# Altium PCB PCB1.PcbDoc
Units mil, origin at the board's own origin, x right, y up, seen from the top; angles counter-clockwise.
Board outline 1481.13 x 2004.6 mil, 2 copper layers (Top Layer, Bottom Layer); 52 components, 37 nets, 204 pads, 62 vias.
Unrouted connection lines stored in the file: 75.
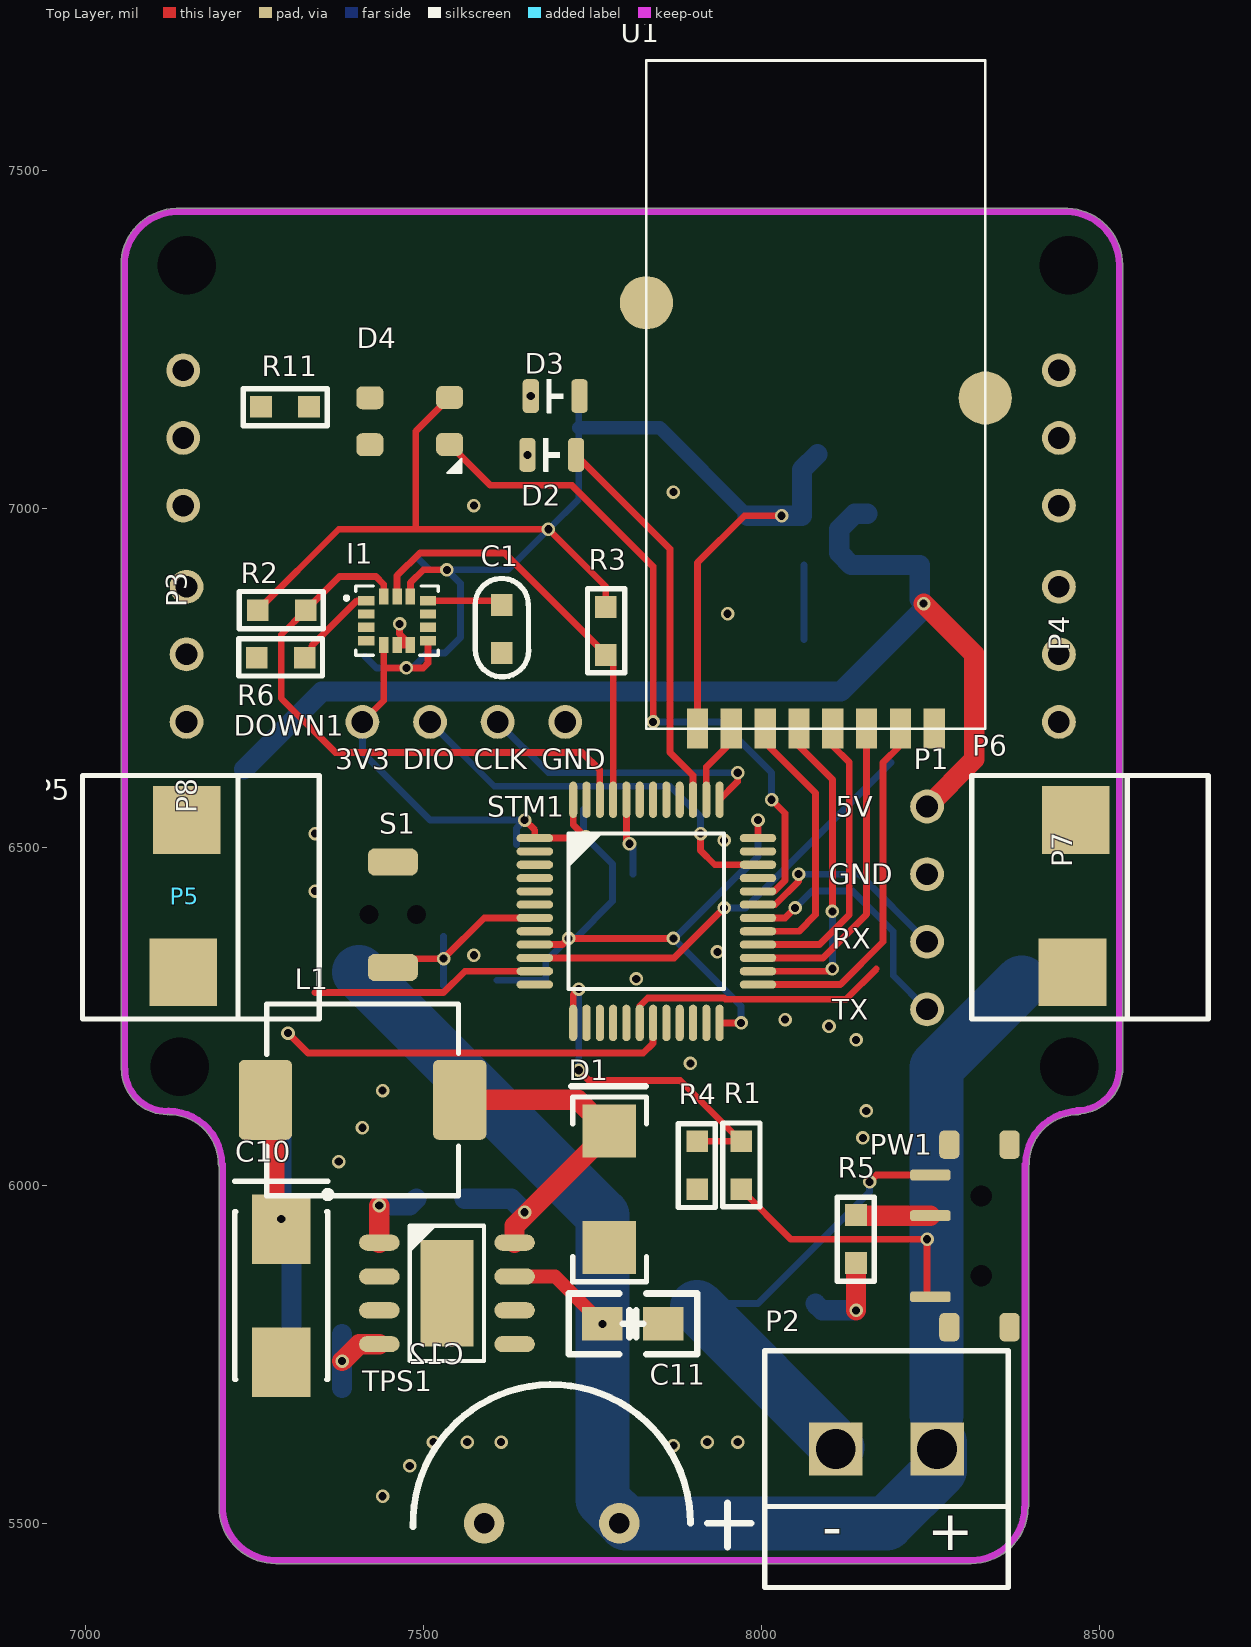
[diagram p0: Top Layer view]
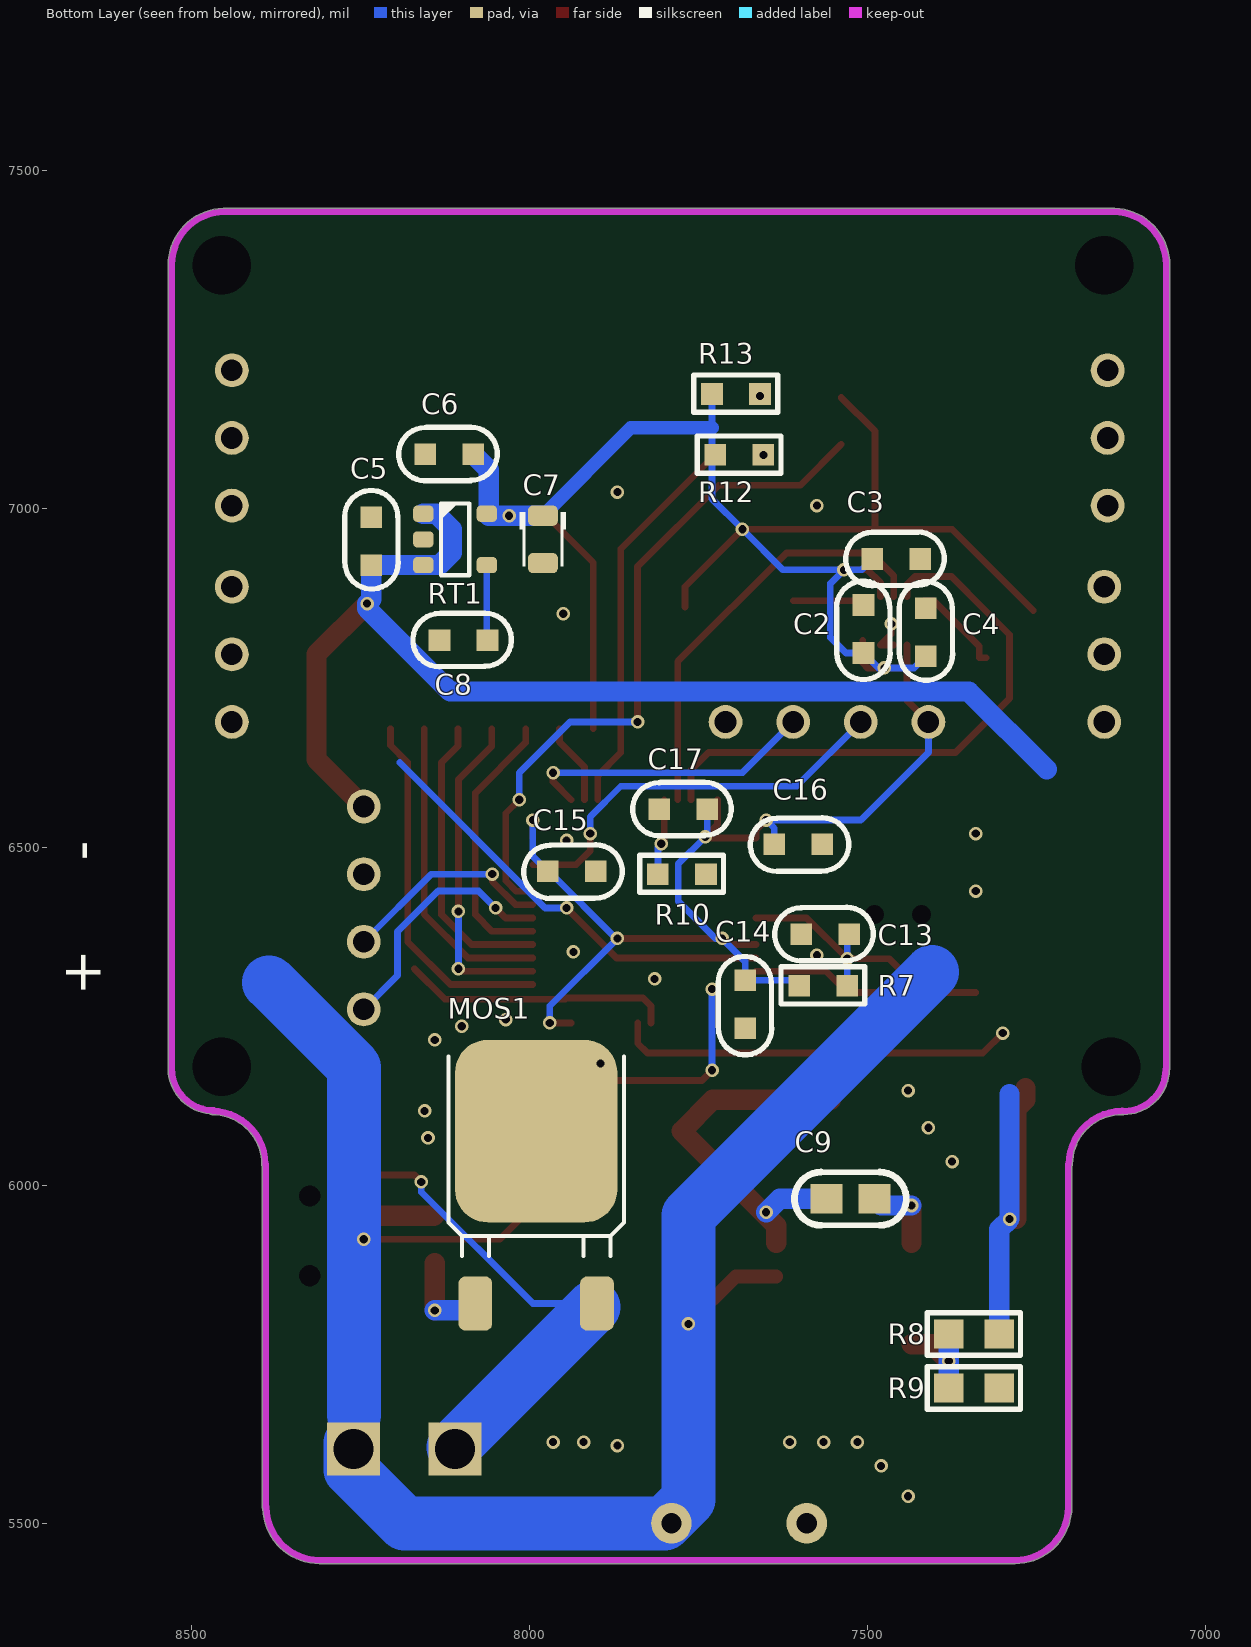
[diagram p1: Bottom Layer view, seen from below]
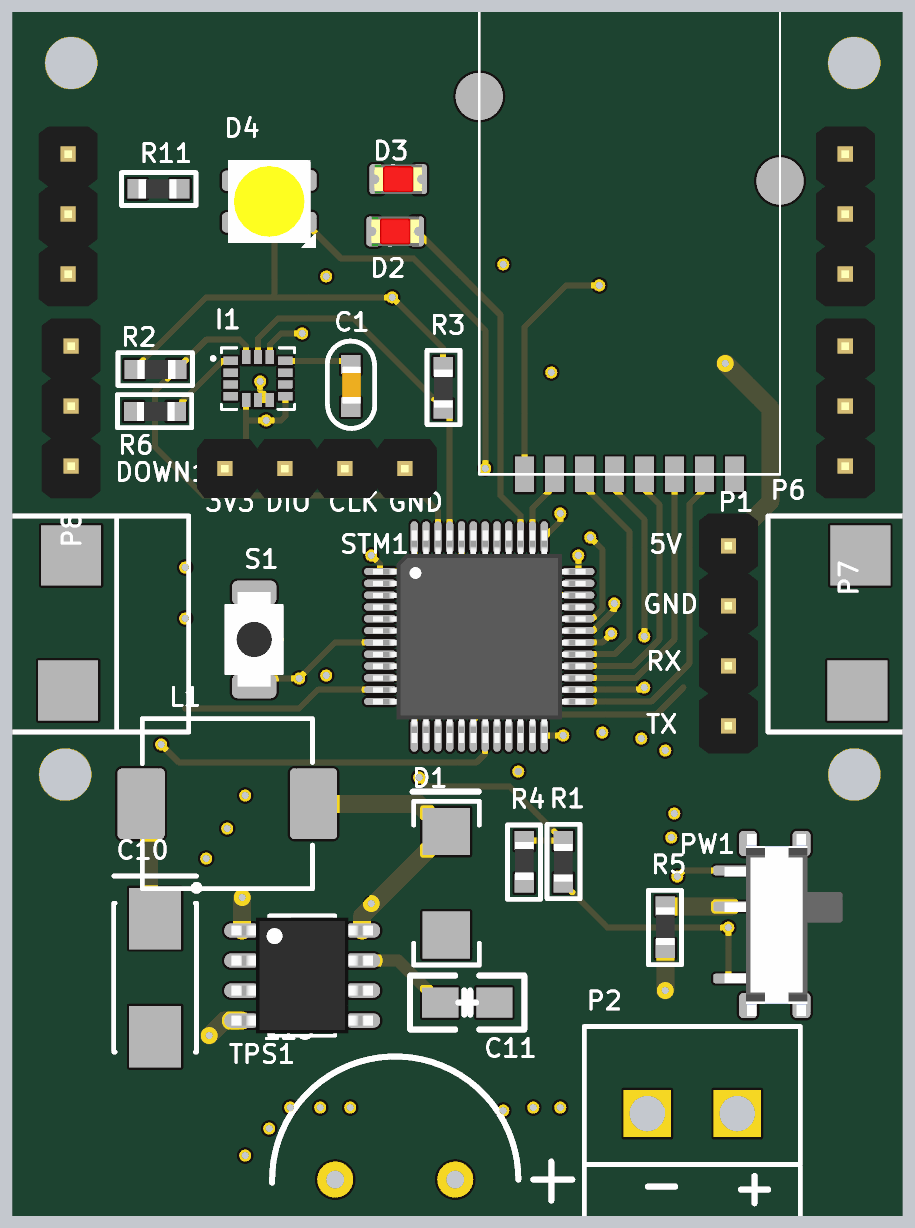
[diagram p2: 3D render of the assembled board from above, using the file's embedded part models]
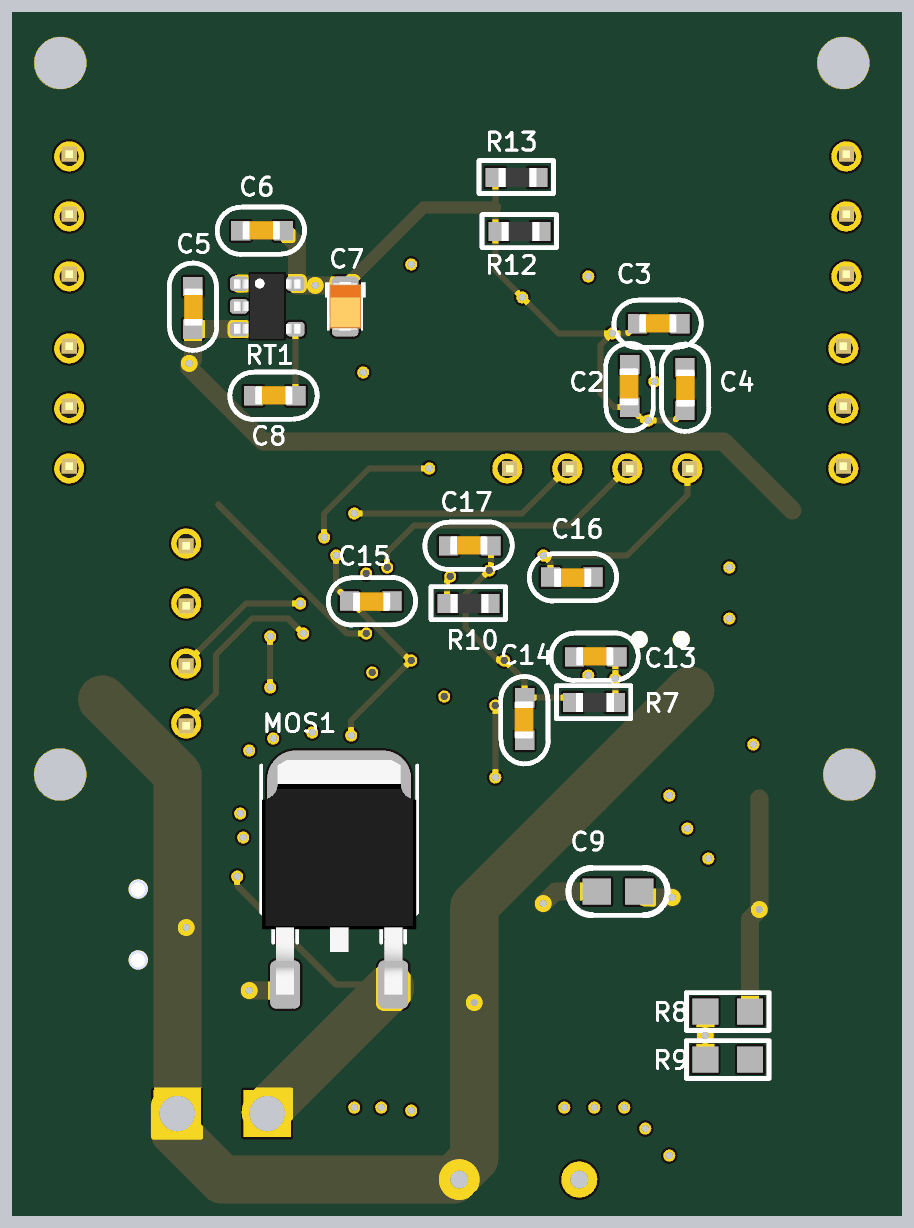
[diagram p3: 3D render of the assembled board from below, using the file's embedded part models]

## Layer stack, top to bottom
Top Solder: solder mask 0.4, Solder Resist, Dk 3.5
Top Layer: signal copper 1.4
Dielectric 1: dielectric 12.6, FR-4, Dk 4.8
Bottom Layer: signal copper 1.4
Bottom Solder: solder mask 0.4, Solder Resist, Dk 3.5

## Board outline
7198.09,5524.17 7198.09,6027.95 cw(c7202.18,6030.85) 7197.17,6030.85 ccw(c7123.47,6030.85) 7123.47,6104.55 cw(c7123.47,6109.57) 7122.63,6104.62 cw(c7121.21,6109.43) 7121.21,6104.42 cw(c7121.21,6171.85) 7053.79,6170.29 cw(c7058.11,6172.85) 7053.09,6172.85 7053.09,7360.83 cw(c7136.85,7360.83) 7134.75,7444.56 cw(c7136.85,7440) 7136.85,7445.02 8450.47,7445.02 cw(c8450.47,7440) 8452.56,7444.56 cw(c8450.47,7360.83) 8534.22,7360.83 8534.22,6167.85 cw(c8529.21,6167.85) 8533.88,6166.02 cw(c8466.79,6172.85) 8472.7,6105.68 cw(c8469.53,6109.57) 8469.53,6104.55 ccw(c8469.53,6030.85) 8395.83,6030.85 cw(c8390.82,6030.85) 8395.01,6028.11 8395.01,5524.17 cw(c8390,5524.17) 8394.18,5521.4 cw(c8310.47,5524.17) 8310.47,5440.42 cw(c8310.47,5445.43) 8310.44,5440.42 7281.85,5440.42 cw(c7281.85,5524.17)

## Design rules (kind name [scope] priority, off if disabled: settings)
Clearance [All] p1: gap=5 ignorepadtopadclearanceinfootprint=FALSE
ComponentClearance [All] p1: gap=10 collisioncheckmode=3 verticalgap=0 showdistances=FALSE
PlaneConnect [All] p1: planeconnectstyle=Direct reliefexpansion=20 reliefentries=4 reliefconductorwidth=10 reliefairgap=10
PolygonConnect [All] p1: connectstyle=Direct reliefconductorwidth=10 reliefentries=4 polygonreliefangle="90 Angle" airgapwidth=10
RoutingVias [All] p1: holewidth=28 width=50 viastyle="Through Hole" minholewidth=28 minwidth=50 maxholewidth=28 maxwidth=50
SolderMaskExpansion [All] p1: expansion=4
Width [All] p1: maxlimit=100 minlimit=10 preferedwidth=10 minimp=50.000000 maximp=50.000000 favimp=50.000000
28 further rules are at their usual default settings.

## Components (designator, comment, footprint, x,y, rotation, side; value= is the part's Value field where it differs from the comment)
C1 "Cap_0603" CAP_0603 7615,6825 r270 top value=0.1uF
C2 "Cap_0603" CAP_0603 7505,6820 r90 bottom value=0.1uF
C3 "Cap_0603" CAP_0603 7460,6925 r180 bottom value=0.1uF
C4 "Cap_0603" CAP_0603 7415,6820 r270 bottom value=0.1uF
C5 "Cap_0603" CAP_0603 8235,6955 r270 bottom value=1u
C6 "Cap_0603" CAP_0603 8121,7080 r180 bottom value=0.1u
C7 "Cap_Tan_0805" CAP_TAN_P0805 7980,6955 r270 bottom value=10u
C8 "Cap_0603" CAP_0603 8100,6805 r180 bottom value=22n
C9 "Cap" CAP-MLCC-0603 7560.87,5980 r0 bottom value=0.1u
C10 "220μF" CAP-TAN-6032/CAPC 7290,5935 r90 top value=*μF
C11 "Cap" 0805C 7855,5795 r180 top value=10uF
C12 "*μF" C_ELE 7790,5500 r180 top
C13 "Cap_0603" CAP_0603 7565,6370 r180 bottom value=0.1u
C14 "Cap_0603" CAP_0603 7680,6265 r90 bottom value=0.1u
C15 "Cap_0603" CAP_0603 7935,6465 r0 bottom value=0.1u
C16 "Cap_0603" CAP_0603 7600,6505 r0 bottom value=0.1u
C17 "Cap_0603" CAP_0603 7775,6555 r180 bottom value=0.1u
D1 "Diode" SS34 7779,5991.4 r270 top
D2 "LED_0805" LED_0805_RED 7690,7080 r0 top
D3 "LED_0805" LED_0805_RED 7695,7167 r0 top
D4 "LED_3535_SK6812" LED_3535_4P 7480,7130 r0 top
DOWN1 "HDR1x4_2.54" HDR1x4_2.54_180 7410,6685 r90 top
I1 "ICM20600" ICM20600 7460,6835 r0 top
L1 "Ind-CD52" CD74 7405,6130 r90 top value=22uH
MOS1 "MOSFET_N" TO-252AA 8080,5825 r180 bottom value=NMOS?
P1 "HDR1x4_2.54" HDR1x4_2.54_180 8245,6260 r180 top
P2 "Connector" "Green 2P" 8190.78,5611.01 r180 top
P3 "HDR1x3_2.54" HDR1X3_2.54_180 7145,7005 r180 top
P4 "HDR1x3_2.54" HDR1X3_2.54_180 8440,7005 r180 top
P5 "Connector" 2P_SMD 7150,6425 r90 top
P6 "Connector" 2P_SMD 8465,6425 r90 top
P7 "HDR1x3_2.54" HDR1X3_2.54_180 8440,6685 r180 top
P8 "HDR1x3_2.54" HDR1X3_2.54_180 7150,6685 r180 top
PW1 "SwitchSPDT_2.8x6.6_90" SwitchSPDT_2.8X6.6_90 8325,5925 r90 top
R1 "Res_0603" RES_0603 8052,6028 r270 top value=10K
R2 "Res_0603" RES_0603 7292,6932 r0 top value=10K
R3 "Res_0603" RES_0603 7852,6818 r270 top value=10K
R4 "Res_0603" RES_0603 7823,6031 r90 top value=2K
R5 "Res_0603" RES_0603 8058,5922 r90 top value=10K
R6 "Res_0603" RES_0603 7291,6862 r0 top value=10K
R7 "Res_0603" RES_0603 7564,6377 r180 bottom value=10K
R8 "Res1" RES-0603 7380,5780 r0 bottom value=10K
R9 "Res1" RES-0603 7305.2,5700 r180 bottom value=3.3K
R10 "Res_0603" RES_0603 7773,6542 r180 bottom value=10K
R11 "Res_0603" RES_0603 7294,7069 r180 top value=0R
R12 "RES_0805" RES_0603 7688,7162 r180 bottom value=1K
R13 "RES_0805" RES_0603 7693,7252 r180 bottom value=1K
RT1 "RT9193" SOT23-5 8110,6955 r180 bottom
S1 "ButtonTACT_3x4x2_180" ButtonTACT_3x4x2_180H 7455,6400 r90 top
STM1 "STM32F103C" LQFP_P0.5_48 7830,6405 r0 top
TPS1 "TPS5430" "SOP_E150_8 -with_PADs" 7535,5840 r0 top
U1 "NRF24l01_E01_SPI3" E01-ML01SP2 8326.42,6683.94 r90 top

## Footprints (in the part's own frame and the unit in brackets; to place one, negate y for a bottom-side part, rotate by r counter-clockwise, add the part's x,y. Pads: shape width x height; smd on the part's side, far side on the other; paste and mask are expansions set on the pad)
2P_SMD [mil]
  rect 100x100 smd: 1(-110,5) 2(115,0)
  silkscreen extent -179,-196 181,154
0805C [mil]
  rect 60x50 smd: 1(0,0) 2(90,0)
  silkscreen extent -50,-45 140,45
ButtonTACT_3x4x2_180H [mil]
  round 0 hole 28: 0(0,35) 0(0,-35)
  rrect50% 40x74 smd: 1(-78,0) 2(78,0)
  body extent -79,-49 79,49, height 63
C_ELE [mil]
  round 60 hole 30: 1(0,0) 2(200,0)
  silkscreen extent -195,-205 305,35
CAP-MLCC-0603 [mm]
  rect 1.2x1.1 smd: 1(0,0) 2(-1.8,0)
  silkscreen extent -3,-1 1.2,1, body extent -1.77,-0.47 -0.02,0.48, height 0.85
CAP-TAN-6032/CAPC [mm]
  rect 2.6x2.2 smd: 1(0,0) 2(-5,0)
  silkscreen extent -5.65,-1.88 1.8,1.75
CAP_0603 [mil]
  rect 32x32 smd: 1(-33,1) 2(38,1)
  silkscreen extent -72,-38 73,41, body extent -30,-14 33,18, height 31
CAP_TAN_P0805 [mil]
  rrect50% 30x44 smd: 1(-35,0) 2(35,0)
  silkscreen extent -40,-34 40,34, body extent -40,-27 40,27, height 59
CD74 [mm]
  rrect20% 3x2 smd: 1(-0.095,-3.784) 2(-0.095,3.516)
  silkscreen extent -3.69,-3.73 3.51,3.47, body extent -3.68,-3.71 3.51,3.45, height 4
E01-ML01SP2 [mm]
  rect 1.5x0.8 smd: 1(-0.225,10.689) 2(-0.225,9.419) 3(-0.225,8.149) 4(-0.225,6.879) 5(-0.225,5.609) 6(-0.225,4.339) 7(-0.225,3.069) 8(-0.225,1.799)
  round 2 smd: 10(12.195,-0.121) 11(15.775,12.609)
  silkscreen extent -0.23,-0.12 24.87,12.61
"Green 2P" [mm]
  rect 2x2 hole 1.5: 1(-1.758,0.026) 2(2.052,0.026)
  silkscreen extent -4.43,-3.66 4.72,5.23
HDR1X3_2.54_180 [mil]
  round 50 hole 32: 1(0,0) 2(0,-100) 3(0,-200)
  body extent -49,-250 49,50, height 323
HDR1x4_2.54_180 [mil]
  round 50 hole 32: 1(0,0) 2(0,-100) 3(0,-200) 4(0,-300)
  body extent -49,-350 49,50, height 323
ICM20600 [mm]
  rect 0.61x0.35 smd: 1(-1.127,0.746) 2(-1.127,0.246) 3(-1.127,-0.254) 4(-1.127,-0.754) 8(1.193,-0.754) 9(1.193,-0.254) 10(1.193,0.246) 11(1.193,0.746)
  rect 0.35x0.61 smd: 5(-0.467,-0.914) 6(0.033,-0.914) 7(0.533,-0.914) 12(0.533,0.906) 13(0.033,0.906) 14(-0.467,0.906)
  silkscreen extent -1.94,-1.3 1.58,1.3
LED_0805_RED [mil]
  rrect50% 24x50 smd: 1(-36,0) 2(36,0)
  silkscreen extent -12,-24 12,24, body extent -40,-25 40,25, height 43
LED_3535_4P [mil]
  rrect50% 40x34 smd: 1(-59,34.45) 2(-59,-35) 3(59,-34.45) 4(59,35)
  silkscreen extent 55,-77 77,-55, body extent -69,-69 69,69, height 26
LQFP_P0.5_48 [mil]
  oval 54x12 smd: 1(-165,108.27) 2(-165,88.58) 3(-165,68.9) 4(-165,49.21) 5(-165,29.53) 6(-165,9.84) 7(-165,-9.84) 8(-165,-29.53) 9(-165,-49.21) 10(-165,-68.9) 11(-165,-88.58) 12(-165,-108.27) 25(165,-108.27) 26(165,-88.58) 27(165,-68.9) 28(165,-49.21) 29(165,-29.53) 30(165,-9.84) 31(165,9.84) 32(165,29.53) 33(165,49.21) 34(165,68.9) 35(165,88.58) 36(165,108.27)
  oval 12x54 smd: 13(-108.27,-165) 14(-88.58,-165) 15(-68.9,-165) 16(-49.21,-165) 17(-29.53,-165) 18(-9.84,-165) 19(9.84,-165) 20(29.53,-165) 21(49.21,-165) 22(68.9,-165) 23(88.58,-165) 24(108.27,-165) 37(108.27,165) 38(88.58,165) 39(68.9,165) 40(49.21,165) 41(29.53,165) 42(9.84,165) 43(-9.84,165) 44(-29.53,165) 45(-49.21,165) 46(-68.9,165) 47(-88.58,165) 48(-108.27,165)
  silkscreen extent -115,-115 115,115, body extent -177,-178 177,177, height 61
RES-0603 [mm]
  rect 1.1x1.1 smd: 1(0,0) 2(-1.9,0)
  silkscreen extent -2.7,-0.8 0.8,0.8, body extent -1.8,-0.47 -0.1,0.48, height 0.6
RES_0603 [mil]
  rect 32x32 smd: 1(-37,-82) 2(34,-82)
  silkscreen extent -64,-109 60,-54, body extent -31,-98 31,-66, height 18
"SOP_E150_8 -with_PADs" [mil]
  oval 60x24 smd: 1(-100,75) 2(-100,25) 3(-100,-25) 4(-100,-75) 5(100,-75) 6(100,-25) 7(100,25) 8(100,75)
  rect 78.74x157.48 smd: 9(0,0)
  silkscreen extent -55,-100 55,100, body extent -118,-96 118,96, height 69
SOT23-5 [mil]
  rrect50% 30x24 smd: 1(-47,38) 2(-47,0) 3(-47,-38) 4(47,-38) 5(47,38)
  silkscreen extent -21,-53 21,53, body extent -55,-57 55,57, height 57
SS34 [mm]
  rect 2x2 smd: A(2.125,-0.102) K(-2.25,-0.102)
  silkscreen extent -3.94,-1.52 3.4,1.3, body extent -2.48,-1.48 2.37,1.3, height 1.4
SwitchSPDT_2.8X6.6_90 [mil]
  rrect50% 42x30 smd: 0(-135,-42) 0(-135,47) 0(135,-42) 0(135,47)
  round 10 hole 31.5: 0(-59.06,0) 0(59.06,0)
  rrect50% 16x60 smd: 1(90,75) 2(30,75) 3(-90,75)
  body extent -152,-111 151,86, height 55
TO-252AA [mil]
  rrect40% 50x80 smd: 1(0,0) 3(180,0)
  rrect40% 240x270 smd: 4(90,255)
  silkscreen extent -40,70 220,365, body extent -39,-17 219,374, height 91

## Part data
C1 C2 C3 C4 C5 C6 C7 C8 C11 C13 C14 C15 C16 C17: "Capacitor"
  C11: LatestRevisionDate=17-Jul-2002, LatestRevisionNote="Re-released for DXP Platform.", PackageReference=RAD-0.3, Published=8-Jun-2000, Publisher="Altium Limited"
C9: library part Cap_1, "Capacitor", LatestRevisionDate=17-Jul-2002, LatestRevisionNote="Re-released for DXP Platform.", PackageReference=RAD-0.3, Published=8-Jun-2000, Publisher="Altium Limited"
C10: library part CAP-TAN, "钽电容", LatestRevisionDate=17-Jul-2002, LatestRevisionNote="Re-released for DXP Platform.", PackageDescription="Polarized Capacitor; 2 Leads", PackageReference=POLAR0.8, Published=8-Jun-2000, Publisher="Altium Limited"
C12: library part CAP-ELE, "电解电容", LatestRevisionDate=17-Jul-2002, LatestRevisionNote="Re-released for DXP Platform.", PackageDescription="Polarized Capacitor (Radial); 2 Leads", PackageReference=RB7.6-15, Published=8-Jun-2000, Publisher="Altium Limited"
D2 D3 D4: "LED"
DOWN1 P1 P3 P4 P7 P8: "Header"
L1: library part Ind_CD52, "Inductor"
MOS1: "MOSFET"
P2 P5 P6: library part 2P
PW1: "Switch"
R1 R2 R3 R4 R5 R6 R7 R8 R9 R10 R11 R12 R13: "Resistor"
  R8 R9: LatestRevisionDate=17-Jul-2002, LatestRevisionNote="Re-released for DXP Platform.", PackageReference=AXIAL-0.3, Published=8-Jun-2000, Publisher="Altium Limited"
RT1: "Power"
S1: "Button"
STM1: "MCU"
U1: library part NRF24l01_E01_SPI2

## Free pads (board coordinates)
  round 30 hole 86.61: 3(7140,6175) 3(7150,7360.63) 3(8454.76,7360.63) 3(8455,6175)

## Via types
v1: diameter 20, hole 12, Top Layer to Bottom Layer, 62 vias

## Nets (pads, with @x,y where several pads share a name; then routed paths per layer and width w, separated by ;. In a path a pad name is that pad's centre, name@x,y a point inside that pad or via, vN(x,y) a via of type N, cw(c..) or ccw(c..) an arc to the next point about the centre after c; other vN are vias at no path point)
3V3: C2.1 C3.1 C4.2 C6.2 C7.1 C14.2 C15.2 C16.2 C17.2 D4.4 DOWN1.1 I1.5 I1.8 I1.12 R2.1 R3.1 R7.1 R12.1 R13.1 RT1.5 STM1.1 STM1.9 STM1.24 STM1.36 STM1.48 U1.1 | length 4343.6
  Top Layer w10: R2.1 7375,6970 7489,6970 ; DOWN1.1 7441.63,6716.63 7441.63,6765 ; I1.5 7441.63,6765 ; I1.12 7481,6891 7500,6910 v1(7535,6910) ; I1.8 7506.98,6771.98 7500,6765 v1(7475,6765) 7441.63,6765 ; D4.4 7489,7115 7489,6970 ; v1(7650,6540) 7665,6525 STM1.1 v1@7738.27,6513.27 ; STM1.9 7705.79,6355.79 v1(7715,6365) v1(7870,6365) ; STM1.48 7721.73,6533.27 v1(7740,6515) ; R3.1 7770,6885 v1(7685,6970) 7489,6970 ; U1.1 7905.59,6920.59 7975,6990 v1(8030,6990) ; STM1.24 v1(7970,6240) ; STM1.36 v1(7995,6540)
  Bottom Layer w10: DOWN1.1 7410,6640 7510,6540 v1(7650,6540) 7638,6528 C16.2 ; C4.2 7431,6765 v1(7475,6765) 7484,6765 C2.1 7532,6787 7555,6810 7555,6890 v1(7535,6910) ; C3.1 7509,6910 v1(7535,6910) ; R7.1@7609,6303 C14.2 7681,6331 v1(7715,6365) 7725,6365 7780,6420 7780,6475 v1(7740,6515) 7737,6518 C17.2 ; R13.1 7730,7120 7730,7015 v1(7685,6970) 7625,6910 v1(7535,6910) ; v1(7870,6365) 7970,6265 v1(7970,6240) ; v1@7871.72,6365 7970.72,6464 C15.2 7995,6486 v1(7995,6540)
  Bottom Layer w20: 7730,7120 7850,7120 C7.1
  Bottom Layer w30: C7.1 v1(8030,6990) 8060,6990 8060,7058 C6.2
5V: C5.2 C10.1 L1.2 P1.4 P3.2 P4.2 R8.2 RT1.1 RT1.3 | length 2303.6
  Top Layer w30: L1.2@7266.57,6143.43 L1.2 7280,6112.83 C10.1@7280,5950 ; v1(8240,6860) 8315,6785 8315,6630 P1.4
  Bottom Layer w30: 7235,6615 7350,6730 8117.28,6730 8240,6852.72 v1(8240,6860) 8234,6866 C5.2 RT1.3 8133,6917 8115,6935 8115,6970 8138,6993 RT1.1 ; 7290,6135 v1(7290,5950) 7305.2,5934.8 R8.2
ADC: R1.1 R4.2 STM1.13 | length 521.9
  Top Layer w10: STM1.13 7721.73,6281.73 v1(7730,6290) ; v1(7730,6170) 7745,6155 7880,6155 R1.1 R4.2
  Bottom Layer w10: v1(7730,6170) v1(7730,6290)
BGND: MOS1.3 P2.2 PW1.1 | length 730.9
  Top Layer w10: v1(8160,6005) 8170,6015 PW1.1
  Bottom Layer w10: MOS1.3 7995,5825 8160,5990 v1(8160,6005)
  Bottom Layer w80: MOS1.3@7905,5820 P2.2@8112.5,5612.5
CE: STM1.38 U1.2 | length 120.4
  Top Layer w10: STM1.38 7918.58,6618.58 7955.59,6655.59 U1.2
CSN: STM1.29 U1.3 | length 401.1
  Top Layer w10: STM1.29 8055.47,6375.47 8080,6400 8080,6580 8005.59,6654.41 U1.3
GND: C1.2 C2.2 C3.2 C4.1 C5.1 C6.1 C7.2 C8.1 C13.1 C14.1 C15.1 C16.1 C17.1 D3.2 D4.2 DOWN1.4 I1.6 I1.7 P1.3 R6.1 R10.2 R11.1 RT1.2 S1.2 STM1.8 STM1.23 STM1.35 STM1.47 U1.8 | length 57.3
  Top Layer w10: I1.6 I1.7 7465,6815 v1(7465,6830)
  other v1: 8140,6215 8100,6235 8035,6245 7815,6305 7575,6340 7935,6345 7340,6435 7945,6510 7340,6520 7950,6845 7575,7005 7870,7025
IRQ: STM1.25 U1.7 | length 536.9
  Top Layer w10: STM1.25 8116.73,6296.73 8180,6360 8180,6625 8205.59,6650.59 U1.7
LED: D2.2 STM1.39 | length 581.6
  Top Layer w10: D2.2 7865,6941 7865,6640 7898.9,6606.1 STM1.39
LED_PWM: D4.3 STM1.32 | length 1026.2
  Top Layer w10: D4.3 7599.55,7035 7720,7035 7840,6915 v1(7840,6685) ; STM1.32 8018.94,6434.53 8035,6450.59 8035,6550 v1(8015,6570)
  Bottom Layer w10: v1(7840,6685) 7940,6685 8015,6610 v1(8015,6570)
MISO: STM1.27 U1.6 | length 461.8
  Top Layer w10: STM1.27 8091.1,6336.1 8155.59,6400.59 U1.6
MOSI: STM1.28 U1.5 | length 438.5
  Top Layer w10: STM1.28 8085.79,6355.79 8130,6400 8130,6625 8105.59,6649.41 U1.5
NetC1_1: C1.1 I1.11 | length 102.7
  Top Layer w10: I1.11 C1.1@7609.65,6864.35
NetC8_2: C8.2 RT1.4 | length 110
  Bottom Layer w10: C8.2@8063,6807 RT1.4
NetC9_1: C9.1 D1.K L1.1 TPS1.8 | length 560.6
  Top Layer w30: L1.1 7728.73,6126.27 D1.K 7635,5940 TPS1.8
  Bottom Layer w30: C9.1 7630,5980 v1(7650,5960)
NetC9_2: C9.2 TPS1.1 | length 114.1
  Top Layer w30: TPS1.1 v1(7435,5970)
  Bottom Layer w30: v1(7435,5970) 7480,5970 C9.2
NetD2_1: D2.1 R12.2
  other v1: 7654,7080
NetD3_1: D3.1 R13.2
  other v1: 7659,7167
NetI1_1: I1.1 R6.2 | length 135.6
  Top Layer w10: R6.2 7335,6780 7335,6797.06 7402.29,6864.35 I1.1
NetMOS1_1: MOS1.1 R5.1 | length 134.1
  Top Layer w30: v1(8140,5815) R5.1
  Bottom Layer w30: MOS1.1 8090,5815 v1(8140,5815)
NetPW1_2: PW1.2 R5.2 | length 110.4
  Top Layer w30: R5.2 8141,5955 PW1.2
NetR8_1: R8.1 R9.2 TPS1.4 | length 145.4
  Top Layer w30: v1(7380,5740) 7405,5765 TPS1.4
  Bottom Layer w30: R9.2 v1(7380,5740) R8.1
NetR10_1: R10.1 STM1.44 | length 113.9
  Top Layer w10: STM1.44 7800.47,6509.53 v1(7805,6505)
  Bottom Layer w10: v1(7805,6505) 7810,6500 R10.1
NRST: C13.2 R7.2 S1.1 STM1.7 | length 313.3
  Top Layer w10: S1.1 7468,6335 v1(7530,6335) 7590.16,6395.16 STM1.7
  Bottom Layer w10: R7.2 v1(7530,6335) C13.2@7530,6368
PGND: C10.2 C11.1 C12.2 D1.A MOS1.4 P3.3 P4.3 P5.2 P6.2 P7.3 P8.3 R4.1 R9.1 R11.2 TPS1.6
  other v1: 7440,5540 7480,5585 7870,5615 7515,5620 7565,5620 7615,5620 7920,5620 7965,5620 7375,6035 8150,6070 7410,6085 8155,6110 7440,6140 7895,6180
SCL: I1.13 R3.2 STM1.45 | length 634.9
  Top Layer w10: I1.13 7461.31,6901.31 7495,6935 7620,6935 7780.79,6774.21 STM1.45
SCLK: STM1.26 U1.4 | length 487
  Top Layer w10: STM1.26 8101.42,6316.42 v1(8105,6320) ; U1.4 8055.59,6649.41 8105,6600 v1(8105,6405)
  Bottom Layer w10: v1(8105,6320) v1(8105,6405)
SDA: I1.14 R2.2 STM1.46 | length 862.7
  Top Layer w10: I1.14 7441.63,6888.37 7430,6900 7376,6900 R2.2 7290,6814 7290,6720 7370,6640 7735,6640 7761.1,6613.9 STM1.46
SWCLK: DOWN1.3 STM1.37 | length 437.1
  Top Layer w10: STM1.37 7965,6596.73 v1(7965,6610)
  Bottom Layer w10: DOWN1.3 7685,6610 v1(7965,6610)
SWDIO: DOWN1.2 STM1.34 | length 601.7
  Top Layer w10: v1(7910,6520) 7910,6495 7931.1,6473.9 STM1.34
  Bottom Layer w10: DOWN1.2 7605,6590 7865,6590 7910,6545 v1(7910,6520)
T2_CH1: P4.1 STM1.10 | length 646.4
  Top Layer w10: STM1.10 7871.1,6336.1 v1(7945,6410)
  Bottom Layer w10: v1(7945,6410) 7976.72,6410 8191.72,6625
T2_CH2: P3.1 STM1.11 | length 338
  Top Layer w10: 7340,6285 7530,6285 7561.42,6316.42 STM1.11
T3_CH3: P7.1 STM1.18 | length 399.4
  Top Layer w10: STM1.18 7820.16,6265.16 7832,6277 7944.9,6277 7946.9,6275 8125,6275 8170,6320
T3_CH4: P8.1 STM1.19 | length 588.3
  Top Layer w10: v1(7300,6225) 7329.68,6195.32 7825.32,6195.32 7839.84,6209.84 STM1.19
USART1_RX: P1.2 STM1.31 | length 316.4
  Top Layer w10: STM1.31 8020.47,6414.84 8055,6449.37 v1(8055,6460)
  Bottom Layer w10: v1(8055,6460) 8145,6460 P1.2
USART1_TX: P1.1 STM1.30 | length 377.1
  Top Layer w10: STM1.30 8035.16,6395.16 v1(8050,6410)
  Bottom Layer w10: v1(8050,6410) 8075,6435 8135,6435 8195,6375 8195,6310 P1.1
VBAT: C11.2 C12.1 P2.1 P5.1 P6.1 PW1.3 R1.2 TPS1.7 | length 2818.7
  Top Layer w10: R1.2 8044,5920 v1(8245,5920) 8245,5840 PW1.3 PW1.3@8225,5835
  Top Layer w20: TPS1.7 7695,5865 v1(7765,5795)
  Bottom Layer w10: 8225,5945 8259.22,5945
  Bottom Layer w80: 7405,6315 7765,5955 v1(7765,5795) 7765,5535 7800,5500 8185,5500 8264.22,5579.22 P2.1@8264.22,5619.22 ; 8259.22,5660 8259.22,5945 8259.22,6174.22 8385,6300
pads on no net: D4.1 I1.2 I1.3 I1.4 I1.9 I1.10 P7.2 P8.2 PW1.0 S1.0 STM1.2 STM1.3 STM1.4 STM1.5 STM1.6 STM1.12 STM1.14 STM1.15 STM1.16 STM1.17 STM1.20 STM1.21 STM1.22 STM1.33 STM1.40 STM1.41 STM1.42 STM1.43 TPS1.2 TPS1.3 TPS1.5 TPS1.9 U1.10 U1.11

## Keep-outs
Keep-Out Layer:
  lines w10: 7058.11,6172.85 7058.11,7360.83 cw(c7136.85,7360.83) 7136.85,7439.57 ; 7058.79,6171.85 ccw(c7121.21,6171.85) 7121.21,6109.43 ; 7123.47,6109.57 cw(c7123.47,6030.85) 7202.18,6030.85 ; 7136.85,7440 8450.47,7440 ; 7203.11,6030.85 7203.11,5524.17 ccw(c7281.85,5524.17) 7281.85,5445.43 8310.47,5445.43 ccw(c8310.47,5524.17) 8389.21,5524.17 ; 8390,5524.17 8390,6030.85 ; 8390.82,6030.85 cw(c8469.53,6030.85) 8469.53,6109.57 ; 8450.47,7439.57 cw(c8450.47,7360.83) 8529.21,7360.83 8529.21,6167.85 ; 8466.79,6110.43 ccw(c8466.79,6172.85) 8529.21,6172.85

## Silkscreen, mask and mechanical layers (free items; w line width, h text height)
Top Overlay:
  text "3V3" at 7370,6615 h30
  text "DIO" at 7470,6615 h30
  text "CLK" at 7575,6615 h30
  text "GND" at 7675,6615 h30
  text "5V" at 8110,6545 h30
  text "GND" at 8100,6445 h30
  text "RX" at 8105,6350 h30
  text "TX" at 8105,6245 h30
  text "-" at 8090,5465 h60
  text "+" at 8245,5460 h60
Bottom Overlay:
  text "-" at 6935,6495 h60 r90
  text "-" at 8680,6480 h60 r90
  text "+" at 6940,6295 h60 r90
  text "+" at 8685,6280 h60 r90